# EAGLE board Thicc_Spacers (EAGLE 9.5.2)
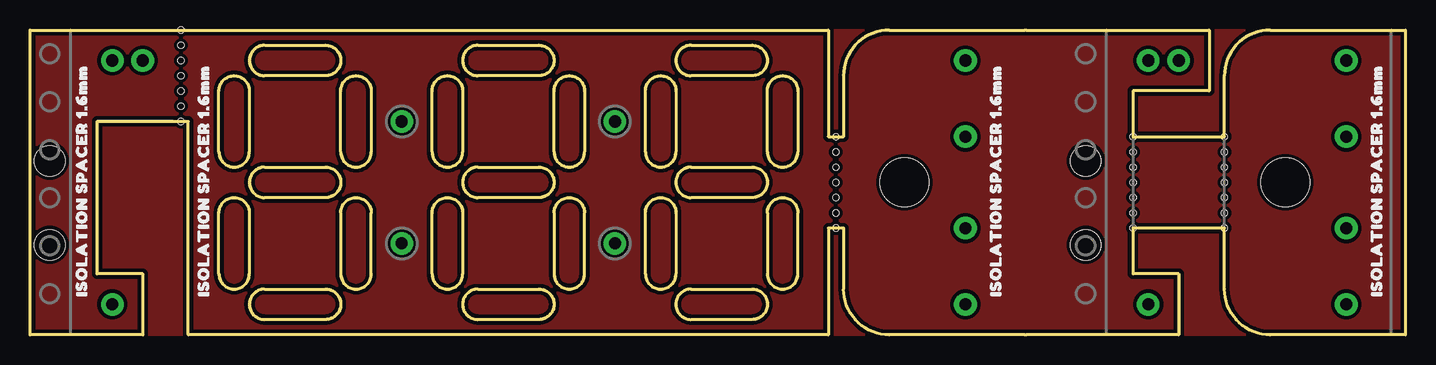
[diagram p0: board, top side]
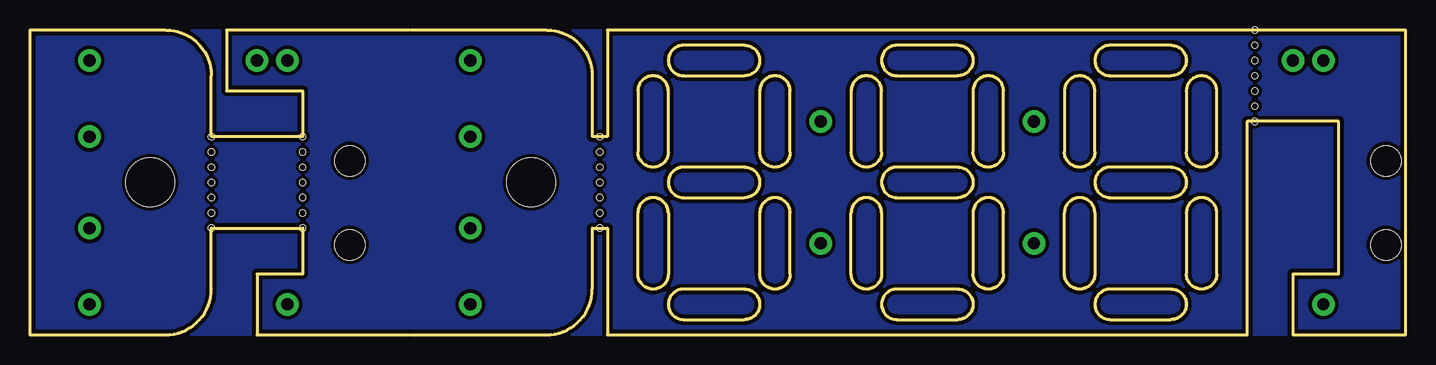
[diagram p1: board, bottom side, seen from below]

Size 114.68 x 25.4 mm. Coordinates in mm from the lower left corner, seen from the top.
Outline: 83.06,0 95.76,0 95.76,5.08 91.95,5.08 91.95,8.89 99.57,8.89 99.57,3.81 arc90 103.38,0 114.68,0 114.68,25.4 103.38,25.4 arc90 99.57,21.59 99.57,16.51 91.95,16.51 91.95,20.32 98.3,20.32 98.3,25.4 83.06,25.4
Outline: 82.93,25.4 71.63,25.4 arc90 67.82,21.59 67.82,16.51 66.55,16.51 66.55,25.4 0,25.4 0,0 9.4,0 9.4,5.08 5.59,5.08 5.59,17.78 13.21,17.78 13.21,0 66.55,0 66.55,8.89 67.82,8.89 67.82,3.81 arc90 71.63,0 82.93,0
Outline: 19.56,24.13 24.64,24.13 arc-180 24.64,21.59 19.56,21.59 arc-180 19.56,24.13
Outline: 18.29,20.32 18.29,15.24 arc-180 15.75,15.24 15.75,20.32 arc-180 18.29,20.32
Outline: 28.45,20.32 28.45,15.24 arc-180 25.91,15.24 25.91,20.32 arc-180 28.45,20.32
Outline: 19.56,13.97 24.64,13.97 arc-180 24.64,11.43 19.56,11.43 arc-180 19.56,13.97
Outline: 18.29,10.16 18.29,5.08 arc-180 15.75,5.08 15.75,10.16 arc-180 18.29,10.16
Outline: 25.91,10.16 25.91,5.08 arc180 28.45,5.08 28.45,10.16 arc180 25.91,10.16
Outline: 19.56,3.81 24.64,3.81 arc-180 24.64,1.27 19.56,1.27 arc-180 19.56,3.81
Outline: 37.34,24.13 42.42,24.13 arc-180 42.42,21.59 37.34,21.59 arc-180 37.34,24.13
Outline: 36.07,20.32 36.07,15.24 arc-180 33.53,15.24 33.53,20.32 arc-180 36.07,20.32
Outline: 46.23,20.32 46.23,15.24 arc-180 43.69,15.24 43.69,20.32 arc-180 46.23,20.32
Outline: 37.34,13.97 42.42,13.97 arc-180 42.42,11.43 37.34,11.43 arc-180 37.34,13.97
Outline: 36.07,10.16 36.07,5.08 arc-180 33.53,5.08 33.53,10.16 arc-180 36.07,10.16
Outline: 43.69,10.16 43.69,5.08 arc180 46.23,5.08 46.23,10.16 arc180 43.69,10.16
Outline: 37.34,3.81 42.42,3.81 arc-180 42.42,1.27 37.34,1.27 arc-180 37.34,3.81
Outline: 55.12,24.13 60.2,24.13 arc-180 60.2,21.59 55.12,21.59 arc-180 55.12,24.13
Outline: 53.85,20.32 53.85,15.24 arc-180 51.31,15.24 51.31,20.32 arc-180 53.85,20.32
Outline: 64.01,20.32 64.01,15.24 arc-180 61.47,15.24 61.47,20.32 arc-180 64.01,20.32
Outline: 55.12,13.97 60.2,13.97 arc-180 60.2,11.43 55.12,11.43 arc-180 55.12,13.97
Outline: 53.85,10.16 53.85,5.08 arc-180 51.31,5.08 51.31,10.16 arc-180 53.85,10.16
Outline: 61.47,10.16 61.47,5.08 arc180 64.01,5.08 64.01,10.16 arc180 61.47,10.16
Outline: 55.12,3.81 60.2,3.81 arc-180 60.2,1.27 55.12,1.27 arc-180 55.12,3.81
Copper layers (1*16): Top 0.035mm / dielectric 1.5mm / Bottom 0.035mm
Design rules "SparkFun-2-Layer-Minimum-JLCPCB": minimum track width 5mil, minimum drill 0.3mm, track to track 5mil, track to pad 5mil, pad to pad 5mil, via to via 5mil, smd to smd 5mil, copper to edge 7mil, drill to drill 7mil, minimum pad ring 5mil, minimum via ring 5mil, stop-mask expansion 4mil, vias tented up to drill 25mil, thermal gap 10mil
Holes 4.06 mm at 104.65,12.7 72.9,12.7
Holes 2.54 mm at 1.65,7.49 88.01,7.49 1.65,14.49 88.01,14.49
Holes 0.51 mm at 12.57,25.4 12.57,24.13 12.57,22.86 12.57,21.59 12.57,20.32 12.57,19.05 12.57,17.78 99.57,16.51 99.57,15.24 99.57,13.97 99.57,12.7 99.57,11.43 99.57,10.16 99.57,8.89 91.95,16.51 91.95,15.24 91.95,13.97 91.95,12.7 91.95,11.43 91.95,10.16 91.95,8.89 67.18,16.51 67.18,13.97 67.18,12.7 67.18,11.43 67.18,10.16 67.18,15.24 67.18,8.89

## Placement (x,y rotation side)
E$1  [ISOLATION_SPACER_1#6MM0]  80.52,2.54 90 top
E$2  [ISOLATION_SPACER_1#6MM0]  112.27,2.54 90 top
E$3  [ISOLATION_SPACER_1#6MM0]  4.32,2.54 90 top
E$4  [ISOLATION_SPACER_1#6MM0]  14.48,2.54 90 top

## Library data of the parts
E$1-E$4 = output

## Tracks (layer width: path | path; a pad name or v marks a point on that pad's centre or on a via)
GND
  pour Top (isolate 0.305): 0,25.4 114.68,25.4 114.68,0 0,0
  pour Bottom (isolate 0.305): 0,25.4 0,0 114.81,0 114.81,25.4
N$1  (via drill 1.02 pad 1.88)
  other vias: 93.22,2.54
N$2  (via drill 1.02 pad 1.88)
  other vias: 95.76,22.86
N$3  (via drill 1.02 pad 1.88)
  other vias: 93.22,22.86
N$4  (via drill 1.02 pad 1.88)
  other vias: 77.98,2.54
N$5  (via drill 1.02 pad 1.88)
  other vias: 77.98,22.86
N$6  (via drill 1.02 pad 1.88)
  other vias: 77.98,16.51
N$7  (via drill 1.02 pad 1.88)
  other vias: 77.98,8.89
N$41  (via drill 1.02 pad 1.88)
  other vias: 6.86,2.54
N$42  (via drill 1.02 pad 1.88)
  other vias: 9.4,22.86
N$47  (via drill 1.02 pad 1.88)
  other vias: 6.86,22.86
N$48  (via drill 1.02 pad 1.88)
  other vias: 109.73,2.54
N$49  (via drill 1.02 pad 1.88)
  other vias: 109.73,22.86
N$50  (via drill 1.02 pad 1.88)
  other vias: 109.73,16.51
N$51  (via drill 1.02 pad 1.88)
  other vias: 109.73,8.89
N$52  (via drill 1.02 pad 1.88)
  other vias: 48.77,7.62
N$53  (via drill 1.02 pad 1.88)
  other vias: 48.77,17.78
N$54  (via drill 1.02 pad 1.88)
  other vias: 30.99,17.78
N$55  (via drill 1.02 pad 1.88)
  other vias: 30.99,7.62